# Altium PCB 主板（温州研究院改）.pcbdoc
Units mm, origin at the board's own origin, x right, y up, seen from the top; angles counter-clockwise.
Board outline 58.29 x 57.78 mm, 2 copper layers (Top Layer, Bottom Layer); 65 components, 55 nets, 304 pads, 259 vias.
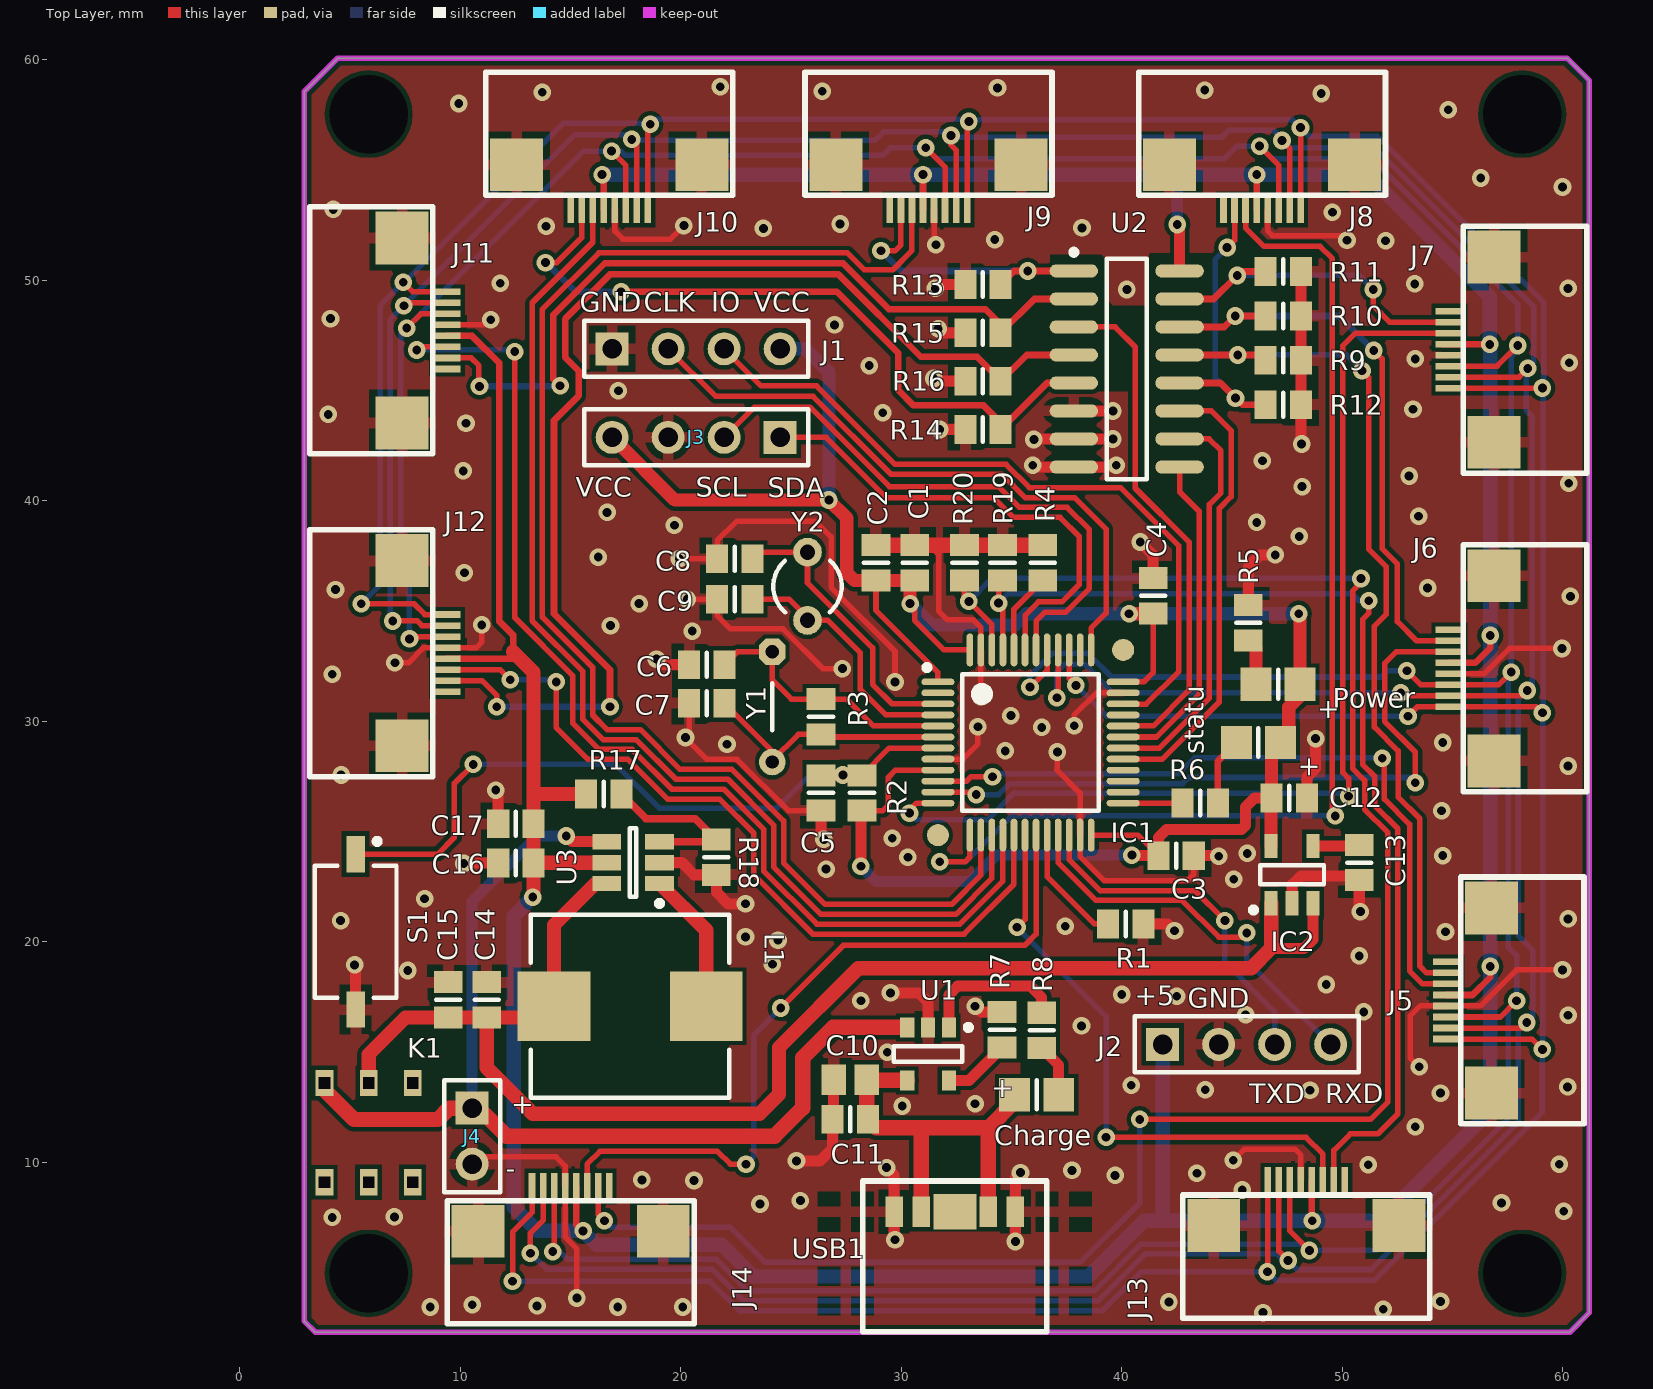
[diagram p0: Top Layer view]
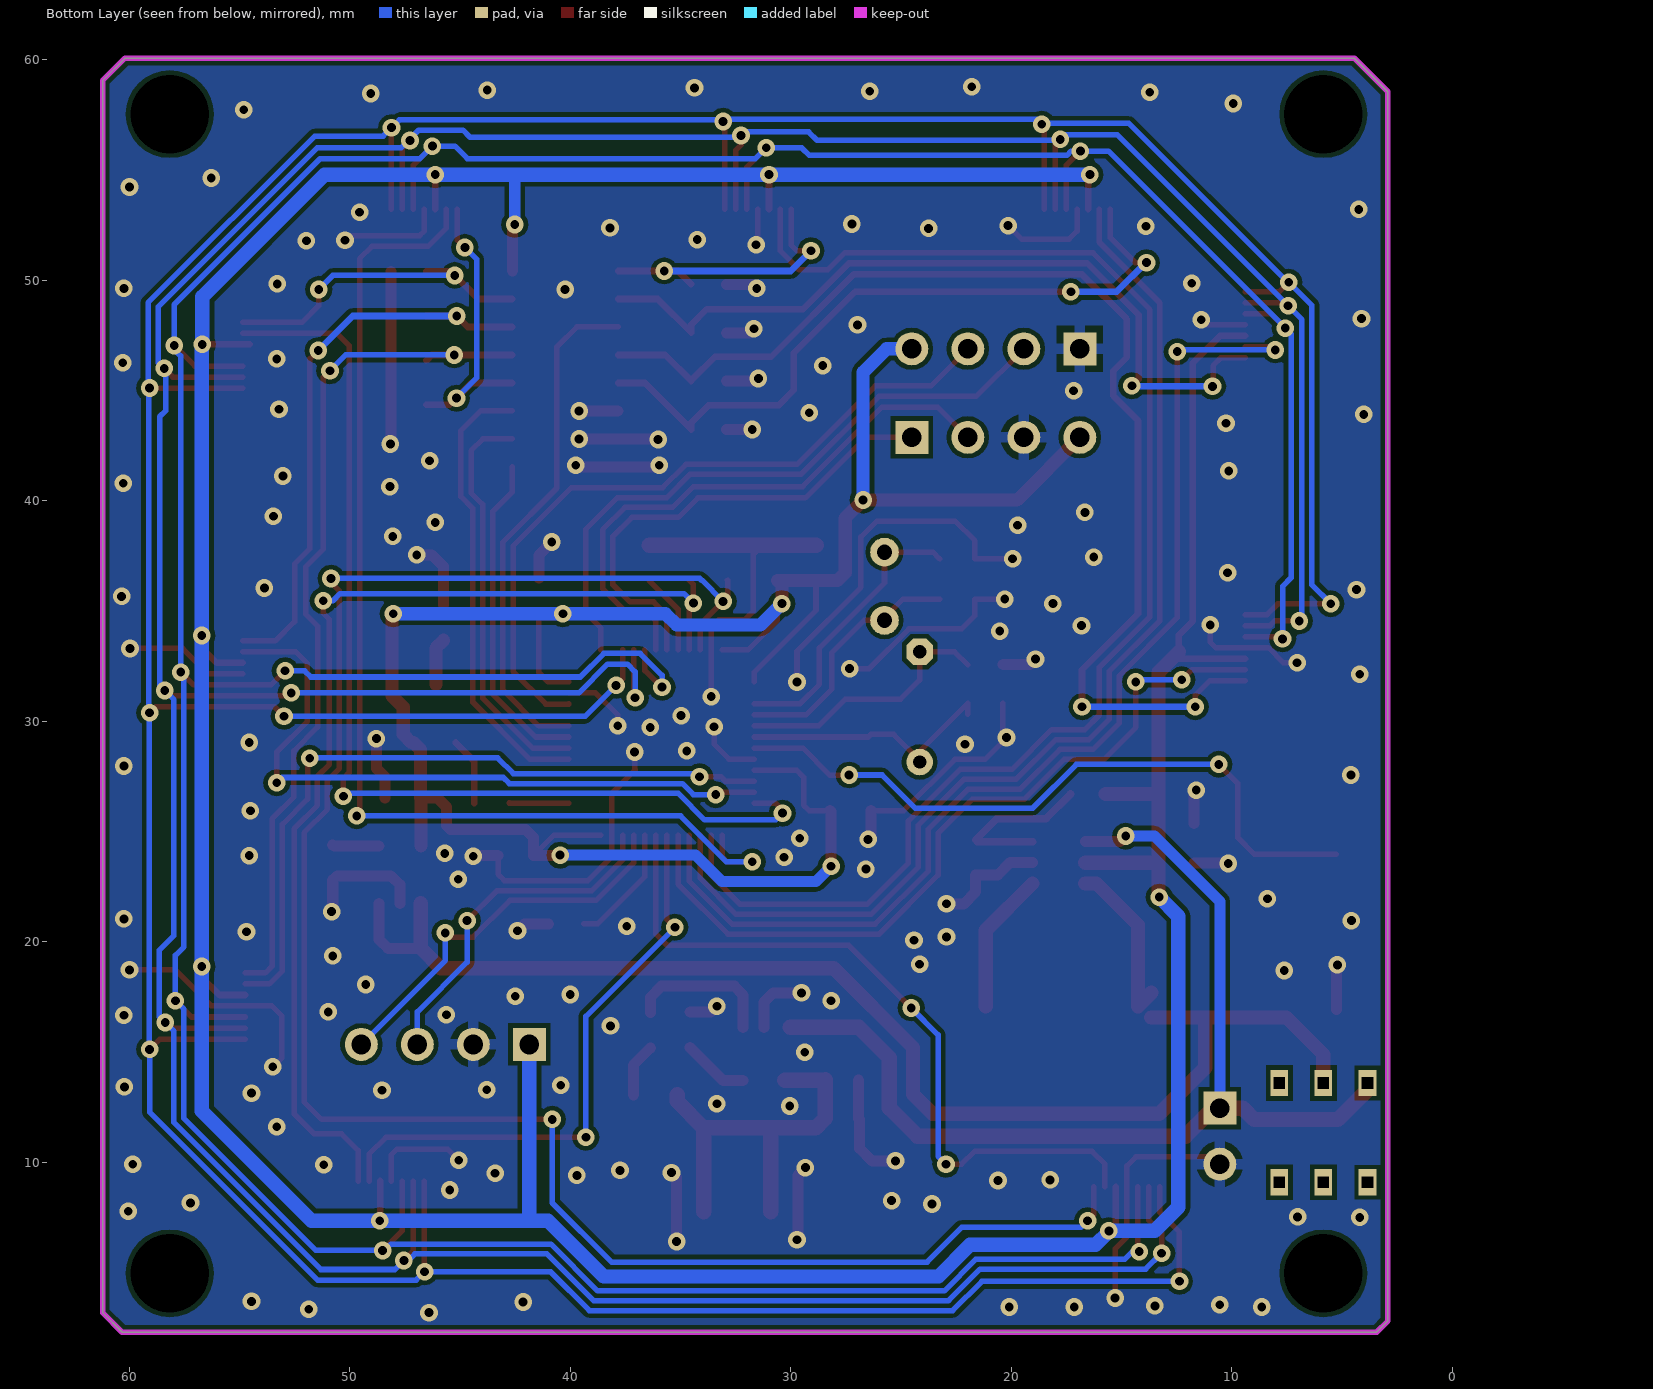
[diagram p1: Bottom Layer view, seen from below]

## Layer stack, top to bottom
Top Solder: solder mask 0.0102, Solder Resist, Dk 3.5
Top Layer: signal copper 0.0356
Dielectric 1: dielectric 0.32, FR-4, Dk 4.8
Bottom Layer: signal copper 0.0356
Bottom Solder: solder mask 0.0102, Solder Resist, Dk 3.5

## Board outline
2.921,2.794 3.429,2.286 60.325,2.286 61.214,3.175 61.214,59.055 60.198,60.071 4.445,60.071 2.921,58.547

## Design rules (kind name [scope] priority, off if disabled: settings)
Clearance [All] p1: gap=0.2 ignorepadtopadclearanceinfootprint=FALSE except(0: Arc-Hole Track-Hole SMDPad-Hole THPad-Hole Via-Hole Fill-Hole Poly-Hole Region-Hole Text-Hole)
Clearance Clearance_1 [InPolygon] p2: gap=0.35 ignorepadtopadclearanceinfootprint=FALSE except(0: Arc-Hole Track-Hole SMDPad-Hole THPad-Hole Via-Hole Fill-Hole Poly-Hole Region-Hole Text-Hole)
ComponentClearance [All] p1 off: gap=0.254 collisioncheckmode=3 verticalgap=0.254 showdistances=FALSE
Height [All] p1 off: minheight=0 maxheight=25.4 prefheight=12.7
HoleSize [All] p1: absolutevalues=TRUE maxlimit=10 minlimit=0.025 maxpercent=80.000 minpercent=20.000
MinimumSolderMaskSliver [All] p1 off: minsoldermaskwidth=0.254
PlaneConnect [All] p1: planeconnectstyle=Relief reliefexpansion=0.508 reliefentries=4 reliefconductorwidth=0.5 reliefairgap=0.3
PolygonConnect PolygonConnect_1 [isvia vs IsPolygon] p1: connectstyle=Direct reliefconductorwidth=0.254 reliefentries=4 polygonreliefangle="90 Angle" airgapwidth=0.254
PolygonConnect [All] p2: connectstyle=Relief reliefconductorwidth=0.5 reliefentries=4 polygonreliefangle="90 Angle" airgapwidth=0.3
RoutingVias [All] p1: holewidth=0.4 width=0.8 viastyle="Through Hole" minholewidth=0.3 minwidth=0.6 maxholewidth=0.508 maxwidth=1.27
SilkToSilkClearance [All] p1 off: silktosilkclearance=0.254
SilkToSolderMaskClearance [IsPad] p1 off: minsilkscreentomaskgap=0.254 clearancetoexposedcopper=TRUE
SolderMaskExpansion [All] p1: expansion=0.102
Width Width_1 [All] p1: maxlimit=10 minlimit=0.1 preferedwidth=0.254 minimp=50.000000 maximp=50.000000 favimp=50.000000
23 further rules are at their usual default settings.

## Classes and differential pairs
net class Power: +5 BAT BAT+ POWER VCC3.3

## Components (designator, comment, footprint, x,y, rotation, side; value= is the part's Value field where it differs from the comment)
C1 "0.1uf" 6-0805_L 30.607,37.186 r270 top
C2 "1uf" 6-0805_L 28.854,37.186 r270 top
C3 "0.1uf" 6-0805_L 42.469,23.901 r180 top
C4 "0.1uf" 6-0805_L 41.427,35.687 r270 top
C5 "0.1uf" 6-0805_L 26.365,26.746 r90 top
C6 "22pF" 6-0805_L 21.184,32.563 r0 top
C7 "22pF" 6-0805_L 21.184,30.81 r0 top
C8 "22pF" 6-0805_L 22.454,37.363 r0 top
C9 "22pF" 6-0805_L 22.454,35.535 r0 top
C10 "1uF" C0805 27.686,13.735 r180 top
C11 "0.1uf" 6-0805_L 27.686,11.938 r0 top
C12 "2.2uF" 6-0805_L 47.6,26.518 r180 top
C13 "470pF" 6-0805_L 50.775,23.586 r90 top
C14 "10uF" 6-0805_L 11.201,17.361 r270 top
C15 "0.1uF" 6-0805_L 9.449,17.361 r270 top
C16 "0.1uf" 6-0805_L 12.522,23.571 r0 top
C17 "22uf" 6-0805_L 12.522,25.349 r0 top
Charge "LED_Green" 6-0805_M 36.144,13.056 r0 top (schematic designator D3)
IC1 "STM32F103C8T6" LQFP48 35.865,29.032 r0 top
IC2 "MIC5205-3.3" SOT-23-5 47.727,23.038 r90 top
J1 "CON4" HDR1X4 16.891,46.888 r0 top
J2 "蓝牙" HDR1X4 41.859,15.342 r0 top
J3 "MPU6050" HDR1X4 24.511,42.875 r180 top
J4 "BAT" HDR1X2 10.541,12.446 r270 top
J5 "CON7" 8P软排线 54.744,17.333 r90 top locked
J6 "CON7" 8P软排线 54.864,32.397 r90 top locked
J7 "CON7" 8P软排线 54.864,46.851 r90 top locked
J8 "CON7" 8P软排线 46.367,53.213 r180 top locked
J9 "CON7" 8P软排线 31.238,53.213 r180 top locked
J10 "CON7" 8P软排线 16.76,53.213 r180 top locked
J11 "CON7" 8P软排线 9.391,47.724 r270 top locked
J12 "CON7" 8P软排线 9.391,33.086 r270 top locked
J13 "CON7" 8P软排线 48.375,9.144 r0 top locked
J14 "CON7" 8P软排线 15.006,8.89 r0 top locked
K1 "BUTTON" switch 7.842,13.589 r270 top
L1 "10UH" 0850 17.704,17.069 r0 top
Power "LED_Red" 6-0805_M 47.092,31.674 r180 top (schematic designator D1)
R1 "10K" 6-0805_L 40.183,20.803 r0 top
R2 "10K" 6-0805_L 28.219,26.746 r270 top
R3 "10M" 6-0805_L 26.365,30.201 r270 top
R4 "10K" 6-0805_L 36.424,37.186 r270 top
R5 "1K" 6-0805_L 45.745,34.468 r270 top
R6 "1K" 6-0805_L 43.561,26.289 r0 top
R7 "330" 6-0805_L 34.569,16.002 r90 top
R8 "330" 6-0805_L 36.373,15.977 r270 top
R9 "10K" 6-0805_L 47.327,46.363 r180 top
R10 "10K" 6-0805_L 47.327,48.379 r180 top
R11 "10K" 6-0805_L 47.327,50.394 r180 top
R12 "10K" 6-0805_L 47.327,44.348 r180 top
R13 "10K" 6-0805_L 33.706,49.809 r0 top
R14 "10K" 6-0805_L 33.706,43.231 r0 top
R15 "10K" 6-0805_L 33.706,47.617 r0 top
R16 "10K" 6-0805_L 33.706,45.424 r0 top
R17 "525K" 6-0805_L 16.51,26.695 r0 top
R18 "100k" 6-0805_L 21.615,23.825 r270 top
R19 "10K" 6-0805_L 34.595,37.186 r270 top
R20 "10K" 6-0805_L 32.868,37.186 r270 top
S1 "KEY_2P" button 5.258,20.447 r270 top
statu "LED_Blue" 6-0805_M 46.203,29.032 r180 top (schematic designator D2)
U1 "PW4054" SOT-23-CT5_L 31.217,14.91 r270 top
U2 "CD4051BCM" M16A_N 40.227,45.974 r0 top
U3 "PS7516" SOT23-6_M 17.837,23.586 r180 top
USB1 "USB" Type-C 32.429,7.747 r0 top locked
Y1 "XTAL_8M" xtal 24.155,33.147 r270 top
Y2 "XTAL_32.768K" R38 25.749,36.119 r0 top

## Footprints (in the part's own frame and the unit in brackets; to place one, negate y for a bottom-side part, rotate by r counter-clockwise, add the part's x,y. Pads: shape width x height; smd on the part's side, far side on the other; paste and mask are expansions set on the pad)
6-0805_L [mm] "Chip Resistor, Body 2.0x1.2mm, IPC High Density"
  rect 1x1.3 smd: 1(-0.8,0) 2(0.8,0)
  silkscreen extent 0,-0.55 0,0.55, body extent -1.07,-0.7 1.07,0.7, height 0.7
6-0805_M [mm] "Chip Resistor, Body 2.0x1.2mm, IPC Low Density"
  rect 1.4x1.5 smd: 1(-1,0) 2(1,0)
  silkscreen extent 0,-0.65 0,0.65, body extent -1.07,-0.7 1.07,0.7, height 0.7
8P软排线 [mm] "8P母座"
  rect 0.3x1.25 smd: 1(-1.75,0) 2(-1.25,0) 3(-0.75,0) 4(-0.25,0) 5(0.25,0) 6(0.75,0) 7(1.25,0) 8(1.75,0)
  rect 2.4x2.4 smd: ""(-4.2,-2.025) ""(4.2,-2.025)
  silkscreen extent -5.6,-6.22 5.6,-0.63
0850 [mm] "电感"
  rect 3.3x3.15 smd: 1(-3.45,0) 2(3.45,0)
  silkscreen extent -4.5,-4.15 4.5,4.15, body extent -4.5,-4.15 4.5,4.15, height 5
button [mm] "SODFL, 2-Leads, Body 3.70x8.00mm, IPC Medium Density"
  rect 1.65x0.85 smd: 1(-3.525,0) 2(3.525,0)
  silkscreen extent -4.22,-1.85 3,1.85, body extent -3,-1.85 3,1.85, height 2.5
C0805 [mm] "Chip Capacitor, Body 2.0x1.3mm, IPC High Density"
  rect 1.1x1.4 smd: 1(-0.75,0) 2(0.75,0)
  body extent -1.1,-0.72 1.1,0.72, height 1.4
HDR1X2 [mm] "Connector; Header; 2 Position"
  rect 1.5x1.5 hole 0.9: 1(0,0)
  round 1.5 hole 0.9: 2(2.54,0)
  silkscreen extent -1.27,-1.27 3.81,1.27
HDR1X4 [mm] "Connector; Header; 4 Position"
  rect 1.5x1.5 hole 0.9: 1(0,0)
  round 1.5 hole 0.9: 2(2.54,0) 3(5.08,0) 4(7.62,0)
  silkscreen extent -1.27,-1.27 8.89,1.27, body extent -1.27,-1.27 8.89,1.27, height 8.38
LQFP48 [mm]
  oval 1.5x0.3 smd: 1(-4.2,2.75) 2(-4.2,2.25) 3(-4.2,1.75) 4(-4.2,1.25) 5(-4.2,0.75) 6(-4.2,0.25) 7(-4.2,-0.25) 8(-4.2,-0.75) 9(-4.2,-1.25) 10(-4.2,-1.75) 11(-4.2,-2.25) 12(-4.2,-2.75) 25(4.2,-2.75) 26(4.2,-2.25) 27(4.2,-1.75) 28(4.2,-1.25) 29(4.2,-0.75) 30(4.2,-0.25) 31(4.2,0.25) 32(4.2,0.75) 33(4.2,1.25) 34(4.2,1.75) 35(4.2,2.25) 36(4.2,2.75)
  oval 0.3x1.5 smd: 13(-2.75,-4.2) 14(-2.25,-4.2) 15(-1.75,-4.2) 16(-1.25,-4.2) 17(-0.75,-4.2) 18(-0.25,-4.2) 19(0.25,-4.2) 20(0.75,-4.2) 21(1.25,-4.2) 22(1.75,-4.2) 23(2.25,-4.2) 24(2.75,-4.2) 37(2.75,4.2) 38(2.25,4.2) 39(1.75,4.2) 40(1.25,4.2) 41(0.75,4.2) 42(0.25,4.2) 43(-0.25,4.2) 44(-0.75,4.2) 45(-1.25,4.2) 46(-1.75,4.2) 47(-2.25,4.2) 48(-2.75,4.2)
  round 1 smd: 49(-4.2,-4.2) 50(4.2,4.2)
  silkscreen extent -4.82,-3.1 3.1,3.52, body extent -4.49,-4.5 4.5,4.5, height 1.6
M16A_N [mm] "SOIC, 16-Leads, Body 9.9x3.9mm, Pitch 1.27mm, IPC Medium Density"
  oval 2.2x0.6 smd: 1(-2.4,4.445) 2(-2.4,3.175) 3(-2.4,1.905) 4(-2.4,0.635) 5(-2.4,-0.635) 6(-2.4,-1.905) 7(-2.4,-3.175) 8(-2.4,-4.445) 9(2.4,-4.445) 10(2.4,-3.175) 11(2.4,-1.905) 12(2.4,-0.635) 13(2.4,0.635) 14(2.4,1.905) 15(2.4,3.175) 16(2.4,4.445)
  silkscreen extent -2.52,-5 0.9,5.42, body extent -2,-5 2,5, height 1.75
R38 [mm] "Crystal, Thru-Hole; 2 Leads; Body 3.1 x 8.2 mm (Dia.xH)"
  round 1.3 hole 0.7: 1(0,1.55) 2(0,-1.55)
  silkscreen extent -1.55,-1.19 1.55,1.17
SOT23-6_M [mm] "SOT23, 6-Leads, Body 2.9x1.6mm, Pitch 0.95mm, Lead Span 2.7mm, IPC Low Density"
  rect 1.3x0.7 smd: 1(-1.2,0.95) 2(-1.2,0) 3(-1.2,-0.95) 4(1.2,-0.95) 5(1.2,0) 6(1.2,0.95)
  silkscreen extent -1.33,-1.55 0.15,1.97, body extent -0.9,-1.55 0.9,1.55, height 1.45
SOT-23-5 [mm]
  rect 1.1x0.6 smd: 1(-1.3,0.95) 2(-1.3,0) 3(-1.3,-0.95) 4(1.3,-0.95) 5(1.3,0.95)
  silkscreen extent -1.72,-1.45 0.42,1.87, body extent -1.37,-1.45 1.43,1.45, height 1.45
SOT-23-CT5_L [mm] "SOT23, 5-Leads, Body 2.9x1.6mm, Pitch 0.95mm, Lead Span 2.7mm, IPC High Density"
  rect 0.9x0.65 smd: 1(-1.2,0.95) 2(-1.2,0) 3(-1.2,-0.95) 4(1.2,-0.95) 5(1.2,0.95)
  silkscreen extent -1.32,-1.55 0.35,1.95, body extent -0.9,-1.55 0.9,1.55, height 1.45
switch [mm]
  rect 1.2x0.8 hole 0.5 square: 1(0,0) 2(0,-2) 3(0,-4) 4(4.5,0) 5(4.5,-2) 6(4.5,-4)
Type-C [mm] "贴片母头"
  rect 0.8x1.4 smd: 1(-2.75,0) 1(2.75,0) 2(-1.52,0) 2(1.52,0) ""(-0.5,0) ""(0.5,0)
  rect 1.95x1.2 smd: ""(0,0) ""(0,0)
  rect 1.95x1.6 smd: ""(0,0) ""(0,0)
  silkscreen extent -4.17,-5.44 4.17,1.4
xtal [mm]
  oct 1.2x1.2 hole 0.6: 1(0,0)
  round 1.2 hole 0.6: 2(5,0)
  silkscreen extent 1.43,0 3.56,0

## Part data
C1 C2 C3 C4 C5 C6 C7 C8 C9 C11 C12 C13 C14 C15 C16 C17: library part "Cap Semi", "Capacitor (Semiconductor SIM Model)"
C10: library part "Cap Pol3", "Polarized Capacitor (Surface Mount)"
Charge Power statu: library part LED, "LED"
IC1: "单片机"
IC2: "稳压"
J1: "连接器"
J2 J3: library part CON4, "Connector"
J4 USB1: library part CON2, "Conjunctor"
J5 J6 J7 J8 J9 J10 J11 J12 J13 J14: "Connector"
K1: "自锁按键"
L1: library part Inductor, "电感"
R1 R2 R3 R4 R5 R6 R7 R8 R9 R10 R11 R12 R13 R14 R15 R16 R17 R18 R19 R20: library part Res3, "Resistor"
S1: "轻触按键2P"
U2: "8-Channel Analog Multiplexer/Demultiplexer"
Y1 Y2: library part XTAL, "Crystal Oscillator"

## Free pads (board coordinates)
  rect 1.2x0.8 hole 3.556: ""(5.842,4.953) ""(5.842,57.531) ""(58.166,4.953) ""(58.166,57.531)

## Via types
v1: diameter 0.8, hole 0.4, Top Layer to Bottom Layer, tented both sides, 259 vias

## Nets (pads, with @x,y where several pads share a name; then routed paths per layer and width w, separated by ;. In a path a pad name is that pad's centre, name@x,y a point inside that pad or via, vN(x,y) a via of type N, cw(c..) or ccw(c..) an arc to the next point about the centre after c; other vN are vias at no path point)
+5: C16.2 C17.2 J2.1 J5.5 J6.5 J7.5 J8.5 J9.5 J10.5 J11.5 J12.5 J13.5 J14.5 R17.1 U2.16 U3.5 | length 208.2
  Top Layer w0.3: J12.5 12.706,32.836 ; J11.5 10.54,47.474 11.76,46.253 11.76,34.544 12.395,33.909 12.395,33.147 ; J14.5 15.256,7.172 15.545,6.883 v1(15.57,6.883) ; v1(16.434,54.788) 16.51,54.712 J10.5 ; J9.5 v1(30.988,54.788) ; J8.5 46.117,54.778 v1(46.126,54.788) ; J13.5 48.625,7.357 v1(48.641,7.341) ; J7.5@54.534,47.101 56.683,47.101 v1(56.693,47.092) ; J5.5 55.912,17.583 56.718,18.39 v1(56.718,18.872) ; J6.5 56.04,32.647 56.718,33.325 v1(56.718,33.884)
  Top Layer w0.5: v1(42.52,52.527) 42.627,52.42 U2.16
  Top Layer w0.65: 12.395,33.147 12.706,32.836 13.322,32.22 13.322,26.67 ; v1(13.284,22.022) 13.322,22.06 C16.2 ; R17.1 13.348,26.695 13.322,26.67 ; U3.5 13.337,23.586 C16.2 ; C16.2 C17.2 13.322,26.67
  Bottom Layer w0.5: 42.494,54.788 42.52,54.762 v1(42.52,52.527)
  Bottom Layer w0.65: v1(13.284,22.022) 12.421,21.158 12.421,7.95 13.487,6.883 v1(15.57,6.883) 15.57,6.858 16.18,6.248 21.869,6.248 23.302,4.816 38.488,4.816 41.013,7.341 41.859,7.341 ; v1(16.434,54.788) v1(30.988,54.788) 42.494,54.788 v1(46.126,54.788) 51.148,54.788 56.693,49.243 v1(56.693,47.092) 56.718,47.066 v1(56.718,33.884) v1(56.718,18.872) 56.718,12.319 51.74,7.341 v1(48.641,7.341) 41.859,7.341 ; J2.1 41.859,7.341
ADC0: IC1.10 J5.6 | length 32.7
  Top Layer w0.25: IC1.10 32.972,27.282 33.172,27.483 v1(34.138,27.483) ; v1(51.816,28.321) 51.917,28.22 51.917,26.467 53.061,25.324 53.061,18.669 53.647,18.083 J5.6
  Bottom Layer w0.25: v1(34.138,27.483) 34.276,27.621 42.58,27.621 43.294,28.335 51.802,28.335 v1(51.816,28.321)
ADC1: IC1.11 J6.6 | length 31.3
  Top Layer w0.25: IC1.11 33.289,26.782 v1(33.401,26.67) ; v1(53.315,27.203) 53.315,28.6 51.929,29.986 51.929,32.625 52.451,33.147 J6.6
  Bottom Layer w0.25: v1(33.401,26.67) 34.416,26.67 34.916,27.171 42.766,27.171 43.041,27.446 53.072,27.446 v1(53.315,27.203)
ADC2: IC1.12 J7.6 | length 48.2
  Top Layer w0.25: v1(30.378,25.832) 30.251,25.832 30.702,26.282 IC1.12 ; v1(50.292,26.594) 50.292,27.404 50.027,27.669 50.027,47.03 50.598,47.601 J7.6
  Bottom Layer w0.25: v1(30.378,25.832) 30.683,25.527 33.909,25.527 35.103,26.721 50.165,26.721 v1(50.292,26.594) v1@50.521,26.594
ADC3: IC1.13 J8.6 | length 51.9
  Top Layer w0.25: v1(31.75,23.622) 32.886,23.622 33.115,23.851 IC1.13 ; J8.6 45.617,52.376 46.457,51.537 48.997,51.537 49.555,50.978 49.555,25.832 v1(49.682,25.705)
  Bottom Layer w0.25: v1(31.75,23.622) 32.918,23.622 35.001,25.705 v1(49.682,25.705)
ADC4: IC1.14 J9.6 | length 64.4
  Top Layer w0.25: J9.6 30.488,51.341 29.616,50.47 28.328,50.47 27.556,51.242 16.291,51.242 13.716,48.666 13.716,34.736 16.01,32.442 16.01,30.269 16.662,29.616 18.165,29.616 19.965,27.817 22.323,27.817 24.663,25.476 24.663,23.575 26.547,21.692 32.293,21.692 33.615,23.014 IC1.14
ADC5: IC1.15 J10.6 | length 51.2
  Top Layer w0.25: J10.6 16.01,51.722 13.266,48.978 13.266,34.549 15.56,32.255 15.56,30.082 16.476,29.166 17.979,29.166 19.778,27.367 22.136,27.367 24.213,25.29 24.213,23.389 26.361,21.242 32.479,21.242 34.115,22.877 IC1.15
ADC6: IC1.16 J11.6 | length 51.7
  Top Layer w0.25: v1(8.026,46.838) 8.163,46.974 J11.6 ; v1(12.471,46.761) 12.471,34.696 15.11,32.058 15.11,29.896 16.29,28.716 17.792,28.716 19.592,26.917 21.95,26.917 23.763,25.103 23.763,23.203 26.174,20.792 32.665,20.792 34.615,22.741 IC1.16
  Bottom Layer w0.25: v1(8.026,46.838) 12.725,46.838 12.649,46.761 v1(12.471,46.761)
ADC7: IC1.17 J12.6 | length 36.6
  Top Layer w0.25: J12.6 11.809,32.336 v1(12.268,31.877) ; v1(14.351,31.782) 14.351,29.718 15.803,28.266 17.606,28.266 19.406,26.467 21.764,26.467 23.313,24.917 23.313,23.016 25.988,20.342 32.852,20.342 35.115,22.604 IC1.17
  Bottom Layer w0.25: v1(12.268,31.877) 14.553,31.877 14.458,31.782 v1(14.351,31.782)
ADC8: IC1.18 J13.6 | length 26.9
  Top Layer w0.25: v1(35.255,20.65) 35.615,21.01 IC1.18 ; v1(39.294,11.125) 48.362,11.125 49.125,10.362 J13.6
  Bottom Layer w0.25: v1(35.255,20.65) 39.294,16.612 v1(39.294,11.125)
ADC9: IC1.19 J14.6 | length 33.9
  Top Layer w0.25: J14.6 15.756,9.915 16.331,10.49 21.666,10.49 22.25,9.906 v1(22.962,9.906) ; v1(24.536,16.993) 27.381,19.837 35.611,19.837 36.115,20.341 IC1.19
  Bottom Layer w0.25: v1(22.962,9.906) 23.317,10.262 23.317,15.773 v1(24.536,16.993)
Address_0: IC1.29 U2.11 | length 20.7
  Top Layer w0.25: IC1.29 41.846,28.282 44.425,30.861 44.425,39.649 44.958,40.183 44.958,43.18 44.069,44.069 U2.11
Address_1: IC1.30 U2.10 | length 18.4
  Top Layer w0.25: IC1.30 41.709,28.782 43.975,31.047 43.975,39.836 44.494,40.355 44.494,42.273 43.967,42.799 U2.10
Address_2: IC1.31 U2.9 | length 14.9
  Top Layer w0.25: IC1.31 41.573,29.282 43.51,31.219 43.51,39.522 42.627,40.405 U2.9
Address_3: IC1.39 J5.1 J6.1 J7.1 J8.1 J9.1 J10.1 J11.1 J12.1 J13.1 J14.1 | length 220.6
  Top Layer w0.25: v1(5.505,35.326) 7.905,35.326 8.395,34.836 J12.1 ; v1(7.417,49.911) 7.854,49.474 J11.1 ; v1(12.37,4.595) 12.37,6.833 13.256,7.719 J14.1 ; J10.1 18.51,56.966 v1(18.618,57.074) ; J9.1 32.988,57.118 v1(33.071,57.201) ; IC1.39 37.615,31.93 v1(37.922,31.623) ; v1(46.609,5.029) 46.625,5.045 J13.1 ; v1(48.108,56.921) 48.117,56.912 J8.1 ; v1(52.984,30.226) 53.405,30.647 J6.1 58.812,30.647 v1(59.08,30.378) ; J5.1 58.61,15.583 v1(59.08,15.113) ; J7.1 59.071,45.101 v1(59.08,45.11)
  Bottom Layer w0.25: v1(5.505,35.326) 6.364,36.185 6.364,48.859 v1(7.417,49.911) 7.468,49.911 14.67,57.113 18.579,57.113 v1(18.618,57.074) 18.835,57.291 v1@32.727,57.291 ; v1(12.37,4.595) 21.331,4.595 22.66,3.266 39.13,3.266 40.894,5.029 v1(46.609,5.029) 46.99,4.648 51.463,4.648 59.08,12.265 v1(59.08,15.113) 59.094,15.127 59.094,30.365 v1(59.08,30.378) 59.12,30.418 59.12,45.071 v1(59.08,45.11) 59.145,45.175 59.145,48.983 51.587,56.54 48.489,56.54 v1(48.108,56.921) 47.752,57.277 33.274,57.277 v1@33.071,57.074 ; v1(37.922,31.623) 39.319,30.226 v1(52.984,30.226)
Address_4: IC1.40 J5.2 J6.2 J7.2 J8.2 J9.2 J10.2 J11.2 J12.2 J13.2 J14.2 | length 215.1
  Top Layer w0.25: v1(6.934,34.544) 8.05,34.544 8.258,34.336 J12.2 ; v1(7.442,48.844) 7.572,48.974 J11.2 ; v1(13.183,5.867) 13.183,6.782 13.756,7.355 J14.2 ; v1(17.78,56.388) 17.932,56.388 18.01,56.31 J10.2 ; v1(32.258,56.566) 32.258,56.134 32.488,55.904 J9.2 ; v1(37.059,31.064) 37.115,31.12 IC1.40 ; J13.2 47.125,5.961 v1(47.549,5.537) ; v1(47.269,56.337) 47.617,55.99 J8.2 ; v1(52.654,31.282) 52.789,31.147 J6.2 58.147,31.147 v1(58.395,31.394) ; J5.2 58.12,16.083 v1(58.369,16.332) ; J7.2 58.022,45.601 v1(58.42,45.999)
  Bottom Layer w0.25: v1(6.934,34.544) 6.814,34.664 6.814,48.216 v1(7.442,48.844) 15.189,56.591 17.577,56.591 v1(17.78,56.388) 17.819,56.349 28.804,56.349 29.187,56.732 32.092,56.732 v1(32.258,56.566) 32.348,56.476 44.538,56.476 44.87,56.808 46.875,56.808 v1@47.207,56.476 ; v1(13.183,5.867) 13.902,5.148 21.414,5.148 22.847,3.716 38.944,3.716 41.063,5.835 47.048,5.835 47.346,5.537 v1(47.549,5.537) 47.955,5.131 51.309,5.131 57.981,11.802 57.981,15.944 v1(58.369,16.332) 58.637,16.6 58.637,19.613 57.981,20.269 57.981,30.981 v1(58.395,31.394) 58.623,31.623 58.623,43.808 58.355,44.076 58.355,45.935 v1(58.42,45.999) 58.688,46.267 58.688,48.804 51.484,56.007 47.676,56.007 47.346,56.337 v1(47.269,56.337) ; v1(37.059,31.064) 37.059,32.233 37.414,32.588 38.303,32.588 39.609,31.282 v1(52.654,31.282)
Address_5: IC1.41 J5.3 J6.3 J7.3 J8.3 J9.3 J10.3 J11.3 J12.3 J13.3 J14.3 | length 209.1
  Top Layer w0.25: v1(7.569,47.828) 8.215,48.474 J11.3 ; v1(7.696,33.731) 7.801,33.836 J12.3 ; v1(14.199,5.944) 14.256,6.001 J14.3 ; v1(16.866,55.855) 17.51,55.21 J10.3 ; v1(31.115,56.007) 31.988,55.134 J9.3 ; v1(35.839,31.547) 35.839,31.52 36.615,32.295 IC1.41 ; v1(46.253,56.083) 47.117,55.22 J8.3 ; J13.3 47.625,6.883 v1(48.514,5.994) ; v1(52.934,32.283) 53.57,31.647 J6.3 57.09,31.647 v1(57.67,32.227) ; J5.3 57.172,16.583 v1(57.912,17.323) ; J7.3 57.023,46.101 v1(57.963,47.041)
  Bottom Layer w0.25: v1(7.696,33.731) 7.696,36.119 7.301,36.514 7.301,47.56 v1(7.569,47.828) 15.596,55.855 v1(16.866,55.855) 17.288,55.855 17.48,55.663 29.159,55.663 29.503,56.007 v1(31.115,56.007) 31.609,55.513 44.667,55.513 45.237,56.083 v1(46.253,56.083) 46.824,55.513 51.342,55.513 57.963,48.892 v1(57.963,47.041) 57.963,46.863 57.67,46.57 v1(57.67,32.227) 57.531,32.088 57.531,19.761 57.912,19.38 v1(57.912,17.323) 57.531,16.942 57.531,11.989 51.537,5.994 v1(48.514,5.994) 48.412,5.994 48.122,6.285 40.877,6.285 38.758,4.166 23.033,4.166 21.6,5.598 14.849,5.598 14.503,5.944 v1(14.199,5.944) ; v1(35.839,31.547) 35.839,32.08 36.83,33.071 38.481,33.071 39.548,32.004 51.771,32.004 52.05,32.283 v1(52.934,32.283)
BAT: J4.1 K1.3 U1.3 U3.4 | length 48
  Top Layer w0.5: v1(14.808,24.79) 15.062,24.536 U3.4
  Top Layer w0.7: K1.3 3.842,13.278 5.187,11.933 8.987,11.933 9.5,12.446 J4.1 10.82,12.446 12.09,11.176 24.257,11.176 25.527,12.446 25.527,14.732 26.905,16.11 U1.3@30.023,16.11
  Bottom Layer w0.5: J4.1 10.541,21.819 13.513,24.79 v1(14.808,24.79)
BAT+: C14.2 C15.2 IC2.1 IC2.3 K1.2 L1.1 U3.6 | length 66.3
  Top Layer w0.5: 46.777,19.7 48.275,19.7 48.677,20.102 IC2.3
  Top Layer w0.65: K1.2 5.842,14.884 7.518,16.561 C15.2 C14.2 ; L1.1@13.644,16.561 C14.2 ; L1.1@13.644,17.678 L1.1 14.254,20.756 16.134,22.636 U3.6 ; IC2.1 46.777,19.7 45.872,18.796 28.054,18.796 24.46,15.202 24.46,13.081 23.571,12.192 13.284,12.192 11.201,14.275 C14.2
BOOT0: IC1.44 R4.2 | length 3.7
  Top Layer w0.25: IC1.44 35.115,35.077 R4.2
BOOT1: IC1.20 R1.1 | length 5.5
  Top Layer w0.25: IC1.20 36.615,22.948 38.76,20.803 R1.1
Common_Out: IC1.32 U2.3 | length 23.4
  Top Layer w0.25: U2.3 39.7,47.879 40.615,46.965 40.615,40.564 43.06,38.118 43.06,31.406 41.437,29.782 IC1.32
EX0: J5.7 R9.2 U2.13 | length 39.8
  Top Layer w0.25: v1(50.902,45.898) 51.206,45.593 51.206,37.795 51.994,37.008 51.994,34.849 51.46,34.315 51.46,29.731 52.541,28.65 52.541,26.555 53.518,25.578 53.518,18.898 53.832,18.583 J5.7
  Top Layer w0.3: U2.13 v1(45.263,46.609) 46.281,46.609 R9.2
  Bottom Layer w0.25: v1(45.263,46.609) 50.19,46.609 v1(50.902,45.898)
EX1: J6.7 R10.2 U2.14 | length 26.5
  Top Layer w0.25: v1(51.435,46.812) 51.816,46.431 51.816,37.822 52.502,37.136 52.502,34.519 53.373,33.647 J6.7
  Top Layer w0.3: U2.14 44.653,47.879 v1(45.153,48.379) R10.2
  Bottom Layer w0.3: v1(45.153,48.379) 49.869,48.379 v1(51.435,46.812)
EX2: J7.7 R11.2 U2.15 | length 15.3
  Top Layer w0.25: v1(51.41,49.581) 51.41,48.844 52.153,48.101 J7.7
  Top Layer w0.3: U2.15 44.171,49.149 v1(45.237,50.216) 45.415,50.394 R11.2
  Bottom Layer w0.25: v1(45.237,50.216) 50.775,50.216 v1(51.41,49.581)
EX3: J8.7 R12.2 U2.12 | length 13.6
  Top Layer w0.25: v1(44.78,51.486) 45.117,51.823 J8.7
  Top Layer w0.3: U2.12 44.475,45.339 v1(45.161,44.653) 45.466,44.348 R12.2
  Bottom Layer w0.25: v1(44.78,51.486) 44.247,50.952 44.247,45.568 v1(45.161,44.653)
EX4: J9.7 R13.2 U2.1 | length 13.2
  Top Layer w0.25: v1(29.083,51.333) 29.718,51.333 29.988,51.603 J9.7
  Top Layer w0.3: R13.2 35.115,50.419 v1(35.738,50.419) U2.1
  Bottom Layer w0.3: v1(29.083,51.333) 29.997,50.419 v1(35.738,50.419)
EX5: J10.7 R14.2 U2.5 | length 32.5
  Top Layer w0.25: v1(13.868,50.8) 14.376,50.8 15.51,51.934 J10.7
  Top Layer w0.3: v1(17.297,49.474) 27.082,49.474 29.87,46.685 29.87,45.009 30.556,44.323 33.731,44.323 34.506,43.548 R14.2 36.614,45.339 U2.5
  Bottom Layer w0.3: v1(13.868,50.8) 13.894,50.8 15.22,49.474 v1(17.297,49.474)
EX6: J11.7 R15.2 U2.2 | length 36.3
  Top Layer w0.25: J11.7 10.498,46.474 10.846,46.126 10.846,45.212 v1(10.871,45.187)
  Top Layer w0.3: v1(14.529,45.212) 14.224,45.517 14.224,48.438 16.553,50.767 27.36,50.767 29.435,48.692 33.807,48.692 34.506,47.993 R15.2 36.038,49.149 U2.2
  Bottom Layer w0.3: v1(10.871,45.187) 14.503,45.187 v1(14.529,45.212)
EX7: J12.7 R16.2 U2.4 | length 54
  Top Layer w0.25: J12.7 10.988,31.836 11.659,31.166 v1(11.659,30.658)
  Top Layer w0.3: v1(16.789,30.658) 16.789,32.334 14.249,34.874 14.249,43.637 15.367,44.755 15.367,45.898 14.757,46.507 14.757,48.235 16.789,50.267 27.153,50.267 30.886,46.533 33.442,46.533 34.506,45.469 R16.2 35.691,46.609 U2.4
  Bottom Layer w0.3: v1(11.659,30.658) v1(16.789,30.658)
EX8: IC1.45 J13.7 R19.2 | length 49.4
  Top Layer w0.25: R19.2 34.417,36.208 v1(34.417,35.357) 34.615,35.159 IC1.45 ; J13.7 49.625,10.534 50.368,11.278 51.613,11.278 52.52,12.185 52.52,25.128 51.467,26.181 51.467,27.502 50.927,28.042 50.927,34.62 51.206,34.9 v1(51.206,35.458)
  Bottom Layer w0.25: v1(34.417,35.357) 34.849,35.789 50.444,35.789 50.775,35.458 v1(51.206,35.458)
EX9: IC1.46 J14.7 R20.2 | length 89.9
  Top Layer w0.25: J14.7 16.256,7.62 v1(16.535,7.341) ; R20.2@32.87,36.383 R20.2 32.868,35.636 v1(33.071,35.433) 34.115,34.389 IC1.46 ; v1(40.818,11.938) 51.283,11.938 52.07,12.725 52.07,24.941 51.017,25.994 51.017,27.315 50.477,27.855 50.477,35.91 51.041,36.474 v1(50.851,36.474)
  Bottom Layer w0.25: v1(16.535,7.341) 16.84,7.036 22.25,7.036 23.821,5.466 38.13,5.466 40.818,8.153 v1(40.818,11.938) ; v1(33.071,35.433) 34.036,36.398 34.049,36.386 34.137,36.474 v1(50.851,36.474)
GND: C1.1 C2.1 C3.1 C4.1 C5.1 C6.1 C7.1 C8.1 C9.1 C10.2 C11.1 C12.1 C13.1 C14.1 C15.1 C16.1 C17.1 IC1.8 IC1.23 IC1.35 IC1.47 IC2.2 J1.1 J2.2 J3.3 J4.2 J5. J5.4 J6. J6.4 J7. J7.4 J8. J8.4 J9. J9.4 J10. J10.4 J11. J11.4 J12. J12.4 J13. J13.4 J14. J14.4 R1.2 R4.1 R5.1 R7.2 R9.1 R10.1 R11.1 R12.1 R13.1 R14.1 R15.1 R16.1 R18.2 R19.1 R20.1 S1.2 U1.2 U2.6 U2.7 U2.8 U3.2 USB1.1 USB1.@32.429,7.747 | length 184.9
  Top Layer w0.25: v1(7.036,32.647) 7.653,32.647 8.342,33.336 J12.4 10.73,33.336 10.973,33.579 v1(10.973,34.366) ; J11.4 11.144,47.974 v1(11.379,48.209) ; J4.2 10.871,10.236 14.351,10.236 14.756,9.831 J14.4 14.756,6.605 15.291,6.071 v1(15.291,3.835) ; J10.4 17.01,52.23 17.374,51.867 19.533,51.867 v1(20.142,52.476) ; v1(19.939,37.363) C8.1 21.654,38.189 22.53,39.065 26.111,39.065 26.822,38.354 26.822,36.068 29.718,33.172 v1(29.718,31.775) ; v1(20.295,35.535) C9.1 21.654,34.785 22.25,34.188 24.638,34.188 26.441,32.385 v1(27.33,32.385) ; C7.1 20.384,29.07 21.187,28.267 22.559,28.267 24.879,25.946 C5.1 ; 31.28,37.986 31.699,37.567 31.699,35.002 32.107,34.595 33.273,34.595 33.615,34.253 IC1.47 33.615,31.126 v1(33.604,31.115) ; J9.4 31.488,51.697 v1(31.572,51.613) ; IC1.8 32.803,28.282 33.477,28.956 v1(33.477,29.743) ; v1(37.084,28.6) 37.084,27.813 37.059,27.788 38.115,26.731 IC1.23 38.115,23.861 39.207,22.769 42.988,22.769 43.269,23.05 C3.1 ; v1(37.846,29.794) 37.846,30.27 38.858,31.282 IC1.35 ; v1(45.06,10.084) 45.568,10.592 47.854,10.592 48.125,10.32 J13.4 ; J8.4 46.617,52.24 46.838,52.019 50.013,52.019 v1(50.216,51.816) ; v1(53.492,14.326) 53.086,14.732 53.086,16.637 53.532,17.083 J5.4 56.275,17.083 57.912,18.72 v1(59.995,18.72) ; J6.4 56.429,32.147 57.582,33.299 v1(59.969,33.299)
  Top Layer w0.5: v1(5.207,18.948) 5.258,18.898 S1.2 ; v1(10.16,23.546) 10.185,23.571 C16.1 ; v1(11.608,26.873) 11.722,26.759 C17.1 ; v1(18.898,32.817) 19.152,32.563 C6.1 ; U3.2 20.051,23.586 20.612,23.025 R18.2 21.615,22.25 22.149,21.717 v1(22.936,21.717) ; v1(25.248,10.058) 26.314,10.058 26.886,10.63 C11.1 26.936,11.988 C10.2 ; C5.1 26.365,24.765 v1(26.492,24.638) ; v1(29.337,9.754) 29.679,9.412 29.679,7.747 v1@29.679,6.477 ; v1(29.515,17.678) 30.81,17.678 31.217,17.272 U1.2 ; v1(31.471,45.542) 31.589,45.424 R16.1 ; v1(31.547,49.632) 31.725,49.809 R13.1 ; v1(31.674,47.803) 31.86,47.617 R15.1 ; v1(31.75,43.231) R14.1 ; v1(33.35,17.069) 33.617,16.802 R7.2 ; v1(35.179,6.401) 35.179,7.747 35.179,9.296 v1(35.408,9.525) ; v1(35.966,41.605) 36.043,41.529 U2.8 39.675,41.529 v1(39.751,41.605) ; v1(36.017,42.774) 36.043,42.799 U2.7 v1(39.599,42.799) ; U2.6 v1(39.599,44.069) ; v1(40.843,38.125) 41.427,37.541 C4.1 ; R1.2 42.088,20.803 v1(42.393,20.498) ; C3.1 44.374,23.901 v1(44.399,23.876) ; R5.1 45.745,37.008 46.279,37.541 v1(46.965,37.541) ; IC2.2 47.727,22.581 48.133,22.987 50.574,22.987 C13.1 50.775,21.412 v1(50.825,21.361) ; R11.1 R10.1 R9.1 R12.1 48.127,42.602 v1(48.158,42.57) ; C12.1 48.4,27.461 48.793,27.854 v1(48.793,29.21)
  Top Layer w0.7: C2.1 C1.1 31.28,37.986 R20.1 R19.1 R4.1
  other v1: 46.406,3.175 51.867,3.327 8.636,3.429 17.145,3.429 20.091,3.429 13.487,3.48 10.541,3.531 42.139,3.658 54.458,3.683 29.718,6.477 4.191,7.493 7.01,7.518 60.046,7.772 23.597,8.103 57.226,8.153 25.425,8.255 45.466,8.738 20.599,9.169 18.237,9.195 39.7,9.398 43.409,9.5 37.744,9.627 51.181,9.881 59.842,9.906 53.315,11.608 30.048,12.548 33.35,12.649 54.458,13.132 48.539,13.259 43.79,13.284 60.223,13.411 40.437,13.487 29.362,14.986 38.176,16.18 60.249,16.662 45.618,16.688 50.978,16.815 28.169,17.323 42.494,17.526 40.005,17.602 49.276,18.059 7.62,18.694 24.155,18.974 50.775,19.355 24.409,20.066 22.936,20.218 54.686,20.447 37.44,20.701 4.572,20.955 60.249,21.031 8.382,21.946 45.085,22.835 26.594,23.292 30.302,23.825 54.559,23.901 45.695,24.003 29.591,24.689 54.508,25.933 4.597,27.559 60.249,27.965 34.722,28.651 22.098,28.956 54.559,29.032 20.218,29.261 36.373,29.718 34.976,30.251 4.191,32.131 20.523,34.087 16.815,34.336 18.11,35.331 60.35,35.662 4.343,35.966 53.873,36.043 10.185,36.728 16.256,37.44 48.057,38.379 19.71,38.887 46.126,39.014 53.467,39.294 16.662,39.472 48.184,40.64 60.274,40.792 53.035,41.123 10.135,41.351 46.38,41.808 10.262,43.51 4.013,43.917 29.159,43.993 53.213,44.145 17.17,44.983 28.55,46.126 60.3,46.253 53.315,46.431 26.975,47.974 4.115,48.26 40.234,49.581 60.249,49.632 53.289,49.835 11.811,49.86 51.968,51.791 34.239,51.841 23.749,52.349 38.202,52.375 13.894,52.451 27.229,52.553 49.555,53.086 4.242,53.213 59.995,54.229 56.286,54.635 54.813,57.734 9.931,58.014 49.047,58.471 13.716,58.522 26.416,58.572 43.764,58.623 34.366,58.725 21.793,58.776
NetC13_2: C13.2 IC2.4 | length 2.1
  Top Layer w0.5: IC2.4 50.726,24.338 C13.2
NetCharge_2: Charge.2 R8.2 | length 2.4
  Top Layer w0.5: R8.2 37.144,14.405 Charge.2
NetIC1_34: IC1.34 J1.3 | length 33.2
  Top Layer w0.25: J1.3 23.647,45.212 26.162,45.212 29.725,41.649 34.754,41.649 35.81,40.593 39.95,40.593 40.165,40.379 40.165,40.377 42.596,37.946 42.596,32.258 41.109,30.771 40.076,30.771 IC1.34
NetIC1_37: IC1.37 J1.2 | length 29
  Top Layer w0.25: J1.2 21.59,44.729 26.008,44.729 29.539,41.199 34.568,41.199 35.624,40.143 37.86,40.143 39.294,38.71 39.294,34.9 38.615,34.221 IC1.37
NetL1_2: L1.2 U3.1 | length 6.4
  Top Layer w0.65: U3.1 21.154,20.52 L1.2
NetPower_2: Power.2 R5.2 | length 2.1
  Top Layer w0.6: R5.2 46.092,33.322 Power.2
NetR6_2: R6.2 statu.2 | length 3.1
  Top Layer w0.3: R6.2 44.361,28.191 statu.2
NetR7_1: R7.1 U1.5 | length 3
  Top Layer w0.5: U1.5 33.077,13.71 R7.1
NetR8_1: R8.1 U1.1 | length 6.8
  Top Layer w0.5: U1.1 32.167,17.587 32.563,17.983 35.865,17.983 36.373,17.475 R8.1
NetR17_2: R17.2 R18.1 U3.3 | length 7.8
  Top Layer w0.35: R17.2 18.428,25.578 20.663,25.578 R18.1 21.527,24.536 U3.3
NRST: C5.2 IC1.7 R2.1 S1.1 | length 31.5
  Top Layer w0.25: S1.1 8.986,23.972 9.728,24.714 9.728,27.178 v1(10.592,28.042) ; v1@27.356,27.546 R2.1 29.455,28.782 IC1.7
  Bottom Layer w0.25: v1(10.592,28.042) 17.043,28.042 19.025,26.06 24.359,26.06 25.857,27.559 v1(27.356,27.559)
PB12: IC1.25 R6.1 | length 2.7
  Top Layer w0.25: IC1.25 42.754,26.282 R6.1
POWER: C10.1 C11.2 Charge.1 U1.4 USB1.2 | length 18.9
  Top Layer w0.7: U1.4 28.461,13.71 C10.1 28.436,11.988 C11.2 28.867,11.557 30.886,11.557 ; USB1.2@30.909,7.747 30.909,11.534 30.886,11.557 ; USB1.2@33.949,7.747 33.949,11.557 ; Charge.1 35.144,12.752 33.949,11.557 ; 30.886,11.557 33.949,11.557
RXD1: IC1.21 J2.4 | length 17.9
  Top Layer w0.25: IC1.21 37.115,23.588 38.834,21.869 42.739,21.869 44.404,20.205 45.478,20.205 v1(45.669,20.396)
  Bottom Layer w0.25: v1(45.669,20.396) 45.669,19.152 J2.4
SCL: IC1.42 J3.2 | length 26.4
  Top Layer w0.25: J3.2 23.343,44.247 25.854,44.247 29.461,40.64 34.417,40.64 35.364,39.693 37.523,39.693 38.532,38.684 38.532,36.017 37.465,34.95 36.525,34.95 36.115,34.54 IC1.42
SDA: IC1.43 J3.1 | length 22.2
  Top Layer w0.25: J3.1 26.59,42.875 29.333,40.132 34.214,40.132 35.103,39.243 37.211,39.243 38.075,38.379 38.075,36.196 37.286,35.408 36.22,35.408 35.615,34.802 IC1.43
TXD1: IC1.22 J2.3 | length 15.9
  Top Layer w0.25: IC1.22 37.615,23.725 39.02,22.319 43.314,22.319 v1(44.679,20.955)
  Bottom Layer w0.25: v1(44.679,20.955) 44.679,19.075 46.939,16.815 J2.3
VCC3.3: C1.2 C2.2 C3.2 C4.2 C12.2 IC1.1 IC1.9 IC1.24 IC1.36 IC1.48 IC2.5 J1.4 J3.4 Power.1 R2.2 statu.1 | length 104.2
  Top Layer w0.25: R2.2 29.172,25.946 29.413,26.187 29.413,27.457 29.738,27.782 IC1.9 ; IC1.24 40.738,24.832 C3.2
  Top Layer w0.254: C2.2 28.854,35.027 31.665,32.216 IC1.1 ; v1@30.607,35.331 30.607,34.565 31.939,33.232 IC1.48 ; IC1.36 41.002,31.782 41.427,32.207 C4.2
  Top Layer w0.5: v1(28.169,23.419) 28.169,25.895 R2.2 ; v1(40.462,23.927) 40.488,23.901 C3.2 41.669,24.727 42.037,25.095 45.441,25.095 45.618,25.273 45.618,26.111 46.025,26.518 C12.2
  Top Layer w0.6: J3.4 19.736,40.03 v1(26.721,40.03) 27.534,39.218 27.534,36.728 27.876,36.386 C2.2 C1.2 30.404,36.182 v1(30.404,35.331) ; v1(40.335,34.874) 41.415,34.874 C4.2 ; IC2.5 46.777,26.495 C12.2 46.8,28.72 47.119,29.039 statu.1@47.209,29.039 ; statu.1 47.574,29.404 47.574,30.632 48.092,31.15 Power.1 48.092,34.814 v1(48.031,34.874)
  Bottom Layer w0.5: v1(28.169,23.419) 28.854,22.733 33.122,22.733 34.315,23.927 v1(40.462,23.927)
  Bottom Layer w0.6: J1.4 25.654,46.888 26.721,45.822 v1(26.721,40.03) ; v1(30.404,35.331) 31.369,34.366 35.179,34.366 35.687,34.874 v1(40.335,34.874) v1(48.031,34.874)
XTAL_A: C6.2 IC1.5 R3.1 Y1.1 | length 12.1
  Top Layer w0.25: C6.2 22.568,33.147 Y1.1 24.155,31.864 25.019,31.001 R3.1 27.521,31.001 28.739,29.782 IC1.5
XTAL_B: C7.2 IC1.6 R3.2 Y1.2 | length 12.3
  Top Layer w0.25: C7.2@21.984,30.319 C7.2 24.079,28.715 Y1.2@24.079,28.223 ; Y1.2 24.079,28.147 Y1.2@24.079,28.223 ; IC1.6 26.484,29.282 R3.2 25.333,29.401 24.117,28.185 Y1.2@24.079,28.223
XTAL_C: C8.2 IC1.3 Y2.1 | length 13.2
  Top Layer w0.25: C8.2 23.559,37.669 Y2.1 25.749,36.278 28.702,33.325 28.702,31.674 29.594,30.782 IC1.3
XTAL_D: C9.2 IC1.4 Y2.2 | length 11.7
  Top Layer w0.25: C9.2 24.917,35.535 Y2.2@25.883,34.569 ; Y2.2 Y2.2@25.883,34.569 ; IC1.4 29.306,30.282 28.143,31.445 28.143,33.096 26.671,34.569 Y2.2@25.883,34.569
pads on no net: IC1.2 IC1.26 IC1.27 IC1.28 IC1.33 IC1.38 IC1.49 IC1.50 J5.8 J6.8 J7.8 J8.8 J9.8 J10.8 J11.8 J12.8 J13.8 J14.8 K1.1 K1.4 K1.5 K1.6 USB1.@31.929,7.747 USB1.@32.929,7.747

## Polygon pours and split planes (outlines as drawn)
GND on Bottom Layer "Top Layer-No Net" (solid, remove dead copper, pour order 56): 3.429,2.286 60.325,2.286 61.214,3.175 61.214,59.055 60.198,60.071 4.445,60.071 2.921,58.547 2.921,2.794 3.429,2.286
GND on Top Layer "Top Layer-No Net" (solid, remove dead copper, pour order 58): 3.429,2.286 60.325,2.286 61.214,3.175 61.214,59.055 60.198,60.071 4.445,60.071 2.921,58.547 2.921,2.794 3.429,2.286

## Keep-outs
Keep-Out Layer:
  the board outline again, w0.254

## Other copper
Top Layer:
  pour cut-out: 36.728,51.181 36.722,44.942 40.615,44.942 40.615,41.681 41.504,40.792 44.526,40.792 44.806,41.072 44.806,50.661 44.215,51.252 41.295,51.252 41.224,51.181 41.224,49.022 41.072,48.87 39.599,48.87 39.294,49.174 39.294,50.952 39.065,51.181
  pour cut-out: 34.737,27.419 34.737,25.847 34.468,25.578 34.162,25.578 33.978,25.762 33.978,26.841 34.569,27.432
  pour cut-out: 38.633,25.917 39.135,26.419 39.928,26.419 40.065,26.282 40.065,25.612 39.878,25.425 38.633,25.425
  pour cut-out: 38.252,32.614 39.141,31.725 40.007,31.725 40.065,31.782 40.065,32.367 39.514,32.918 38.481,32.918 38.252,32.69
  pour cut-out: 32.462,31.623 33.115,32.275 33.115,32.951 33.045,33.02 31.908,33.02 31.812,32.924 31.812,31.714 31.902,31.623
  pour cut-out: 37.223,17.477 37.223,12.206 37.287,12.141 35.56,12.141 35.408,12.294 35.408,17.399 35.509,17.501
  pour cut-out: 36.421,20.215 36.421,18.666 36.347,18.593 36.17,18.593 35.916,18.847 35.916,20.142 36.115,20.341 36.294,20.341
  pour cut-out: 13.386,22.987 18.686,22.987 19.037,22.636 19.037,21.12 18.999,21.082 13.335,21.082 13.183,21.234 13.183,22.784
  pour cut-out: 15.01,27.545 15.01,24.309 15.24,24.079 18.334,24.079 18.593,24.338 18.593,27.254 17.755,28.092 15.265,28.092 14.986,27.813
  pour cut-out: 46.33,34.417 47.879,34.417 48.006,34.29 48.006,33.909 46.406,33.909 46.355,33.96
  pour cut-out: 13.183,21.234 22.2,21.234 22.225,21.209 22.225,12.446 13.208,12.446 13.208,21.184 13.233,21.209
  pour cut-out: -2.159,26.035
  pour cut-out: -7.239,32.131
  pour cut-out: 62.23,30.48

## Silkscreen, mask and mechanical layers (free items; w line width, h text height)
Top Overlay:
  text "GND" at 15.418,48.565 h0.9
  text "CLK" at 18.313,48.565 h0.9
  text "IO" at 21.387,48.565 h0.9
  text "VCC" at 23.317,48.565 h0.9
  text "VCC" at 15.24,40.183 h0.9
  text "SCL" at 20.676,40.183 h0.9
  text "SDA" at 23.952,40.157 h0.9
  text "+" at 48.87,30.124 h0.9
  text "+" at 48.127,28.423 h0.9 r270
  text "+5" at 40.589,17.12 h0.9
  text "GND" at 43.002,16.993 h0.9
  text "+" at 34.087,12.954 h0.9
  text "TXD" at 45.796,12.675 h0.9
  text "RXD" at 49.225,12.675 h0.9
  text "+" at 12.319,12.192 h0.9
  text "-" at 12.065,9.271 h0.9

## Text inside footprints (layer, text, board x,y; h text height)
IC2: Mechanical 15 "1" at 47.891,23.488 h0.9 r180